# EAGLE board arduino_s3v3_r2 (EAGLE 6.1)
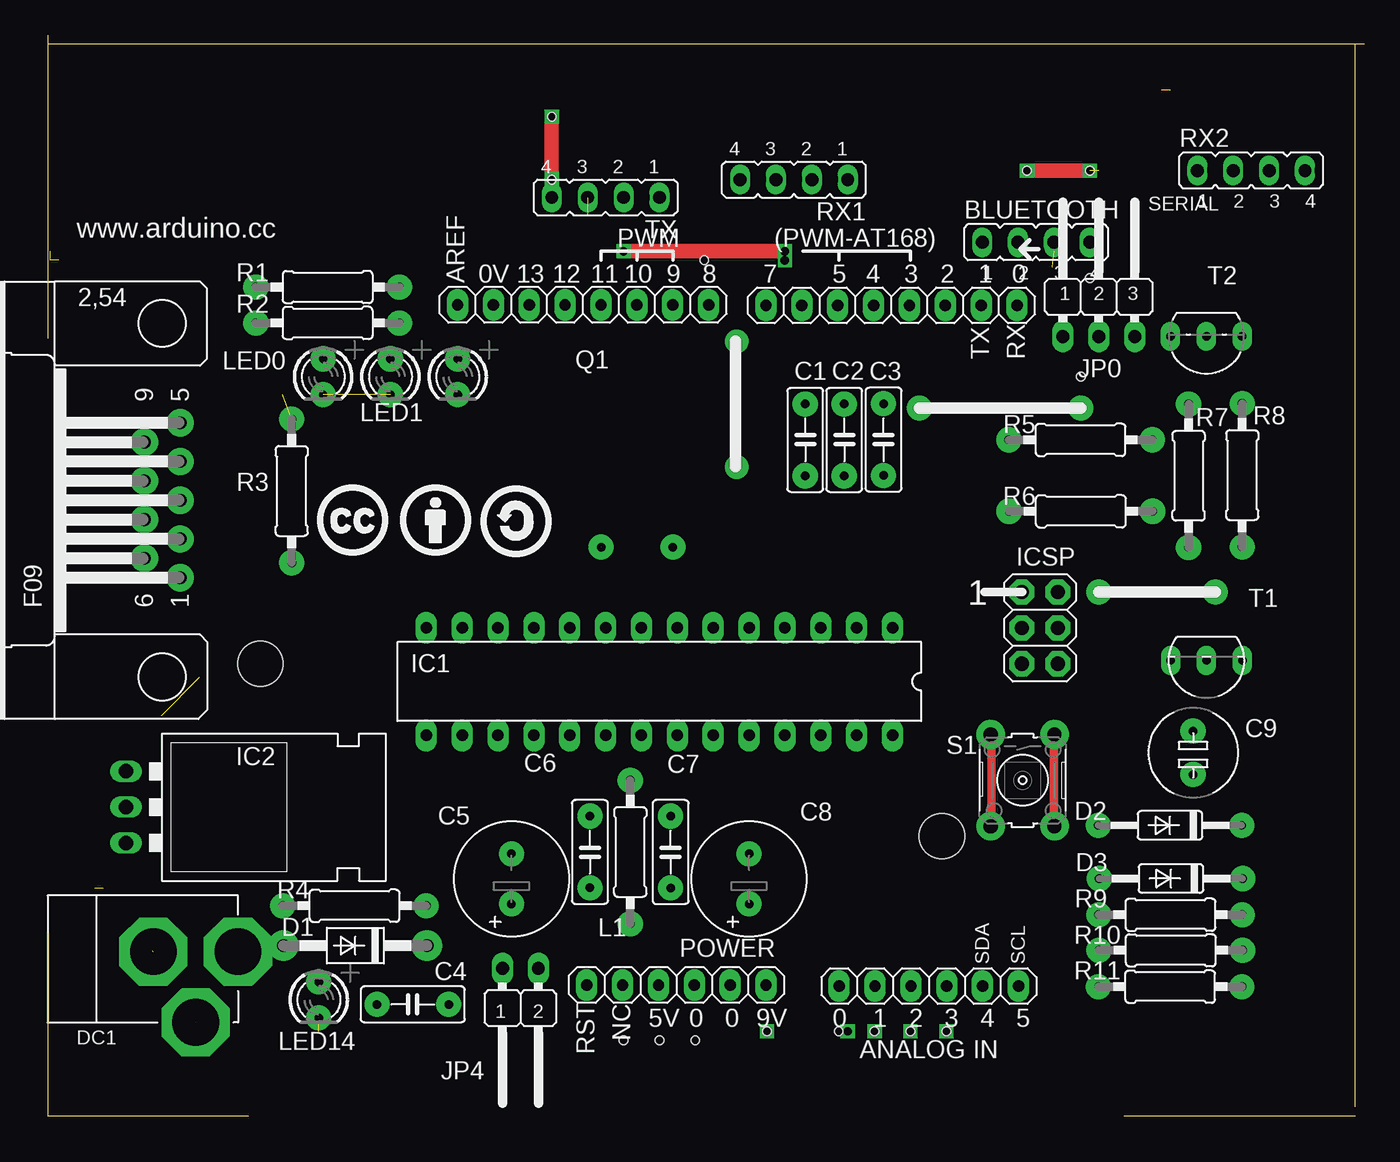
[diagram p0: board, top side]
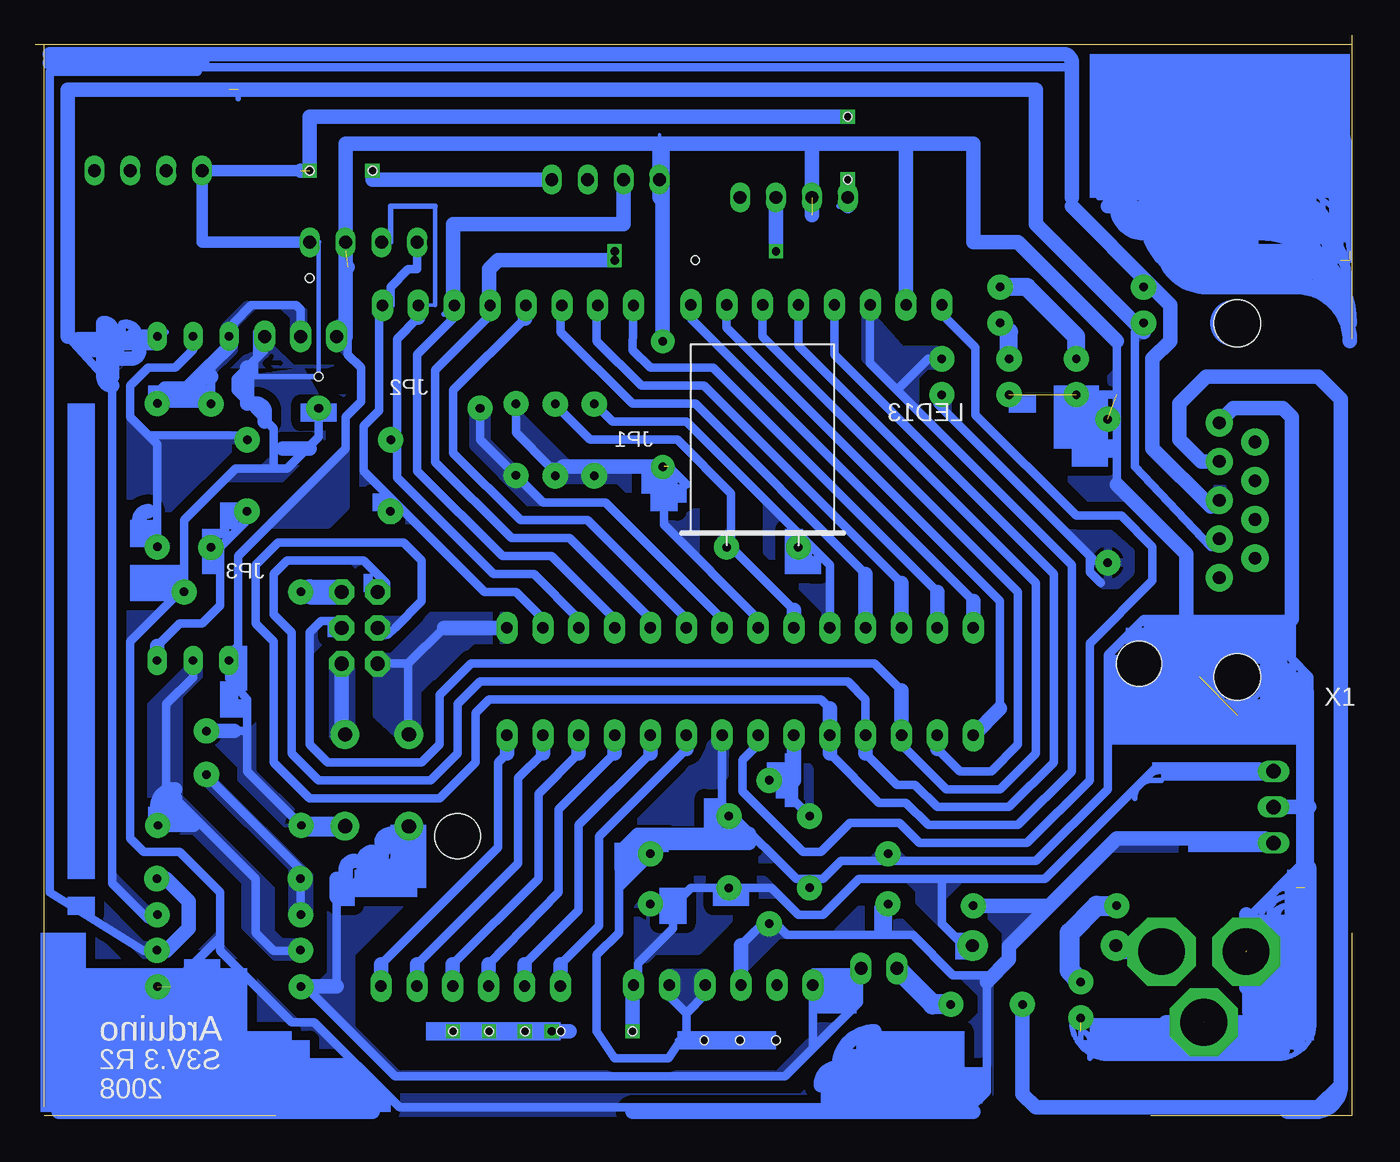
[diagram p1: board, bottom side, seen from below]

Size 93.23 x 76.54 mm. Coordinates in mm from the lower left corner, seen from the top.
Outline: 0.01,76.54 0.01,55.07
Outline: 0.01,12.95 0.01,0 14.23,0
Outline: 76.2,0 92.6,0
Outline: 93.23,75.89 5.48,75.89
Outline: 5.91,75.9 0,75.9
Outline: 92.6,0.64 92.6,14.49
Outline: 92.59,13.54 92.59,75.89
Copper layers (1*16): Top 0.035mm / dielectric 1.5mm / Bottom 0.035mm
Design rules: minimum track width 0.6mm, minimum drill 0.6mm, track to track 0.67mm, track to pad 0.67mm, pad to pad 0.67mm, via to via 0.67mm, smd to smd 0mil, copper to edge 0mil, drill to drill 8mil, minimum pad ring 10mil, minimum via ring 8mil, stop-mask expansion 0mil, vias tented up to drill 0mil, thermal gap 10mil
Net classes: 1 power: width 0.61 mm
Holes 3.2 mm at 63.32,19.81 15.06,32.03
Holes 0.6 mm at 69.35,66.96 73.8,66.96 73.16,52.35 73.8,59.34 35.7,66.32 35.7,70.77 46.49,60.61 56.02,6 58.56,6 61.1,6 63.64,6 50.94,6 40.78,5.36 43.32,5.36 45.86,5.36
bRestrict: 6 lines

## Footprints (pad centres in the part's own frame; a part is rotated, then mirrored left to right if it is on the bottom)
JP4 = drill 0.914 long: 1 -3.81,0; 2 -1.27,0; 3 1.27,0; 4 3.81,0
C050-025X075 = drill 0.6 pad 1.778: 1 -2.54,0; 2 2.54,0
E3,5-8 = drill 0.6 pad 1.778: + -1.778,0; - 1.778,0
E5-6 = drill 0.6 pad 1.778: + -1.54,0; - 1.54,0
DO41-10 = drill 0.9 pad 2.159: A 5.08,0; C -5.08,0
DO35-10 = drill 0.6 pad 1.778: A 5.08,0; C -5.08,0
DC-21MM = drill 3.302 pad 4.826 octagon: 1 -5.08,-3.353; 2 -0.076,-6.35; 3 -0.076,-0.356
DIL28-3 = drill 0.813 pad 1.524 long: 1 -16.51,-3.81; 2 -13.97,-3.81; 3 -11.43,-3.81; 4 -8.89,-3.81; 5 -6.35,-3.81; 6 -3.81,-3.81; 7 -1.27,-3.81; 8 1.27,-3.81; 9 3.81,-3.81; 10 6.35,-3.81; 11 8.89,-3.81; 12 11.43,-3.81; 13 13.97,-3.81; 14 16.51,-3.81; 15 16.51,3.81; 16 13.97,3.81; 17 11.43,3.81; 18 8.89,3.81; 19 6.35,3.81; 20 3.81,3.81; 21 1.27,3.81; 22 -1.27,3.81; 23 -3.81,3.81; 24 -6.35,3.81; 25 -8.89,3.81; 26 -11.43,3.81; 27 -13.97,3.81; 28 -16.51,3.81
78XXL = drill 1.016 long: GND 0,-3.81; IN -2.54,-3.81; OUT 2.54,-3.81
2X03 = drill 1 pad 1.778 octagon: 1 -2.54,-1.27; 2 -2.54,1.27; 3 0,-1.27; 4 0,1.27; 5 2.54,-1.27; 6 2.54,1.27
1X08 = drill 0.8 pad 1.524 long: 1 -8.89,0; 2 -6.35,0; 3 -3.81,0; 4 -1.27,0; 5 1.27,0; 6 3.81,0; 7 6.35,0; 8 8.89,0
1X06 = drill 0.8 pad 1.524 long: 1 -6.35,0; 2 -3.81,0; 3 -1.27,0; 4 1.27,0; 5 3.81,0; 6 6.35,0
JP2W = drill 0.914 pad 1.524 long: 1 -2.54,-1.27; 2 0,-1.27; 3 2.54,-1.27
JP1W = drill 0.914 pad 1.524 long: 1 -1.27,-1.905; 2 1.27,-1.905
0207/10 = drill 0.6 pad 1.778: 1 -5.08,0; 2 5.08,0
LED3MM = drill 0.6 pad 1.778: A -1.27,0; K 1.27,0
Q = drill 0.6 pad 1.778: 1 -2.54,-7.62; 2 2.54,-7.62
B3F-10XX = drill 1 pad 2.032: 1 -3.251,2.261; 2 3.251,2.261; 3 -3.251,-2.261; 4 3.251,-2.261
TO92 = drill 0.6 pad 1.372 long: 1 2.54,0; 2 0,0; 3 -2.54,0
TO92-EBC = drill 0.6 pad 1.372 long: B 0,-1.27; C -2.54,-1.27; E 2.54,-1.27
F09H = drill 0.9 pad 1.93: 1 -5.486,-1.27; 2 -2.743,-1.27; 3 0,-1.27; 4 2.743,-1.27; 5 5.486,-1.27; 6 -4.115,1.27; 7 -1.372,1.27; 8 1.372,1.27; 9 4.115,1.27 | hole 3.302: -12.522,0; 12.522,0

## Placement (x,y rotation side)
BLUETOOTH  BLUETOOTH  [JP4]  69.99,61.88 0 top
C1  22p  [C050-025X075]  56.41,47.88 90 top
C2  22p  [C050-025X075]  53.65,47.88 90 top
C3  100n  [C050-025X075]  59.2,47.9 90 top
C4  100n  [C050-025X075]  25.86,7.9 180 top
C5  100u  [E3,5-8]  32.84,16.79 90 top
C6  100n  [C050-025X075]  38.4,18.7 270 top
C7  100n  [C050-025X075]  44.11,18.69 270 top
C8  100u  [E3,5-8]  49.67,16.79 90 top
C9  10u  [E5-6]  81.11,25.73 270 top
D1  1N4004  [DO41-10]  21.79,12.07 180 top
D2  1N4148  [DO35-10]  79.48,20.58 180 top
D3  1N4148  [DO35-10]  79.54,16.81 180 top
DC1  DC21MMX  [DC-21MM]  7.12,11.71 90 top
IC1  ATMEGA8 (OR 168)  [DIL28-3]  43.32,30.76 180 top
IC2  [78XXL]  9.35,21.87 270 top
ICSP  ICSP  [2X03]  70.25,34.57 270 top
J1  PORT D(D0-D7)  [1X08]  59.75,57.41 180 top
J2  PORT C(A0-A5)  [1X06]  62.4,9.2 0 top
J3  PORT B(D8-D13)  [1X08]  37.91,57.45 180 top
JP0  [JP2W]  74.43,56.48 0 top
JP4  AUTO RESET  [JP1W]  33.48,8.54 180 top
L1  100uH  [0207/10]  41.25,18.7 270 top
LED0  RX  [LED3MM]  19.51,52.35 270 top
LED1  TX  [LED3MM]  24.27,52.35 270 top
LED13  L  [LED3MM]  29.03,52.35 270 top
LED14  POWER LED  [LED3MM]  19.19,8.22 270 top
POWER  [1X06]  44.52,9.28 0 top
Q1  16000  [Q]  41.73,47.91 0 bottom
R1  1K  [0207/10]  19.82,58.7 180 top
R2  1K  [0207/10]  19.82,56.16 180 top
R3  1k  [0207/10]  17.28,44.26 270 top
R4  1k  [0207/10]  21.73,14.89 0 top
R5  10k  [0207/10]  73.14,47.89 0 top
R6  1k  [0207/10]  73.16,42.83 0 top
R7  10k  [0207/10]  80.79,45.34 90 top
R8  10k  [0207/10]  84.59,45.39 270 top
R9  4k7  [0207/10]  79.51,14.25 0 top
R10  10k  [0207/10]  79.53,11.74 0 top
R11  10k  [0207/10]  79.49,9.16 0 top
RX1  [JP4]  52.84,66.32 180 top
RX2  [JP4]  85.23,66.96 0 top
S1  [B3F-10XX]  69.04,23.77 270 top
T1  BC547  [TO92]  82.06,32.26 180 top
T2  BC557  [TO92-EBC]  82.05,53.95 180 top
TX  TX  [JP4]  39.51,65.05 180 top
U$1  [CC]  19.03,39.65 0 top
U$2  [BY]  24.9,39.65 0 top
U$3  [SA]  30.62,39.65 0 top
X1  [F09H]  8.12,43.61 90 top

## Library data of the parts
BLUETOOTH JP0 JP4 RX1 RX2 TX = jumper
C1-C9 L1 R1-R11 = rcl
D1-D3 = diode
DC1 = powersupply
IC1 = atmel
IC2 = v-reg
ICSP J1-J3 POWER = pinhead
LED0 LED1 LED13 LED14 = led
Q1 = special
S1 = switch-omron
T1 T2 = transistor
U$1-U$3 = CC
X1 = con-subd

## Nets
+5V [power]: BLUETOOTH.4 C3.1 C5.+ IC1.7 IC2.OUT ICSP.2 JP0.3 L1.2 POWER.3 R4.2 R11.2 RX1.1 RX2.1 TX.4
AREF: IC1.21 J3.8
GND: BLUETOOTH.3 C1.1 C2.1 C3.2 C5.- C6.2 C7.1 C8.- C9.+ D2.A DC1.1 DC1.3 IC1.8 IC1.22 IC2.GND ICSP.6 J3.7 JP0.1 LED0.K LED1.K LED14.K POWER.4 POWER.5 R3.1 RX1.4 S1.1 S1.2 T1.1 TX.3 X1.5
M8RXD: BLUETOOTH.1 IC1.2 J1.1 R6.1
M8TXD: BLUETOOTH.2 IC1.3 J1.2 R5.1
N$1: IC1.18 ICSP.1 J3.5
N$2: C9.- D3.A R9.1
N$3: LED14.A R4.1
N$4: IC1.17 ICSP.4 J3.4
N$5: IC1.14 J3.1
N$6: C1.2 IC1.9 Q1.1
N$7: C2.2 IC1.10 Q1.2
N$8: D1.A DC1.2
N$10: IC1.4 J1.3 RX1.3
N$11: IC1.5 J1.4 TX.2
N$12: IC1.6 J1.5
N$13: IC1.11 J1.6
N$14: IC1.12 J1.7
N$15: IC1.13 J1.8
N$16: IC1.23 J2.1
N$17: IC1.24 J2.2
N$18: IC1.25 J2.3
N$19: IC1.26 J2.4
N$20: IC1.27 J2.5
N$21: IC1.28 J2.6
N$22: IC1.15 J3.2
N$23: IC1.16 J3.3
N$25: D3.C R1.2 R10.2 X1.3
N$26: R6.2 R7.1 T1.3
N$27: R5.2 R8.2 T2.B
N$31: LED13.K R3.2
N$32: LED1.A R2.1
N$33: LED0.A R1.1
N$34: C4.1 JP4.2
N$38: C4.2 X1.4
N$39: R2.2 R9.2 T2.C X1.2
N$42 [power]: C6.1 IC1.20 L1.1
N$65: D2.C R10.1 T1.2
RESET: IC1.1 ICSP.5 JP4.1 POWER.1 R11.1 S1.3 S1.4
SCK: IC1.19 ICSP.3 J3.6 LED13.A
SERIAL_VCC: JP0.2 R7.2 R8.1 T2.E
VIN [power]: C7.2 C8.+ D1.C IC2.IN POWER.6

## Tracks (layer width: path | path; a pad name or v marks a point on that pad's centre or on a via)
+5V  (via drill 0.6 pad 1.78, 0.61 pad 1.78)  (2 unrouted)
  Top 0.6: v73.16,50.13 v61.73,50.13 | v82.69,37.11 v74.43,37.11
  Top 1.016: TX.4 35.7,70.77 | 69.35,66.96 73.8,66.96
  Bottom 0.254: RX2.1 81.42,66.32
  Bottom 0.305: 73.16,61.88 73.16,52.35
  Bottom 0.406: BLUETOOTH.4 73.16,61.88 | 73.16,52.35 77.61,52.35 77.61,55.53 | 81.42,66.32 81.42,67.59
  Bottom 0.6: 80.15,12.66 80.15,15.84 83,18.7 85.55,18.7 86.5,19.65 86.5,33.62 83,37.11 v82.69,37.11 82.69,42.19 79.04,45.84 76.34,45.84 | v74.43,37.11 73.8,37.11 v74.43,37.11 | 41.25,14.09 43.25,12.1 | IC2.OUT 6.17,19.65 | 80.15,12.66 83.64,9.17 | C3.1 57.29,43.46 52.84,43.46 44.59,35.21 | C3.1 61.73,47.91 v61.73,50.13 | 80.15,12.66 80.15,11.71 75.07,6.63 73.48,6.63 67.45,0.6 26.97,0.6 25.85,1.71 25.85,9.49 25.85,9.97 28.24,9.97 31.09,12.82 | JP0.3 76.97,54.26 78.24,52.99 79.04,52.19 79.04,51.4 76.34,48.7 76.34,45.84 | v73.16,50.13 73.16,48.07 75.38,45.84 76.34,45.84 | R4.2 | 31.09,12.82 | C3.1 59.19,45.53 C3.1 | 41.25,14.09 | 31.09,12.82 32.84,12.82 | 32.84,12.82 39.98,12.82 41.25,14.09 | C5.+ 32.84,12.82
  Bottom 0.813: BLUETOOTH.4 81.42,61.88 81.42,66.32 | 74.43,66.96 RX2.1
  Bottom 1.016: 43.25,12.1 POWER.3 | 21.41,14.89 16.65,19.65 6.17,19.65 | 21.41,14.89 24.27,12.03 24.27,11.08 25.85,9.49 | 83,9.17 83.64,9.17 86.18,9.17 | 21.41,14.89 R4.2 | 44.59,35.21 IC1.7 | 78.24,52.99 78.24,50.45 | RX1.1 69.35,66.32 69.35,66.96 | 74.43,66.96 73.8,66.96 73.8,70.77 35.7,70.77
  Bottom 1.778: 73.8,37.11 ICSP.2
  pour Bottom: 25.38,1.55 25.38,9.97 27.13,9.97 27.92,9.97 26.49,8.54 26.49,7.27 27.6,6.16 34.43,6.16 39.03,1.55 68.4,1.55 73.48,6.63 74.43,6.63 80.15,12.35 80.15,13.3 83.64,9.81 84.59,9.81 85.23,9.17 89.99,13.94 89.99,-0.04 26.97,-0.04
  pour Bottom (no thermals): 7.12,18.7 17.6,18.7 16.65,19.65 7.12,19.65
  pour Bottom: 73.16,51.08 71.26,51.08 72.69,49.65 72.69,47.91 75.7,44.89 79.99,44.89 78.88,46 77.29,46 76.18,47.11 76.18,48.54 78.72,51.08 78.72,51.08 79.04,51.4 79.04,52.35 74.27,52.99
  pour Bottom: 86.5,33.62 86.5,37.75 85.86,38.38 83.64,38.38 82.69,39.34 82.69,37.43
  pour Bottom (no thermals): 72.05,53.15 74.91,53.15 76.34,54.58 76.81,54.58 80.31,52.99 72.53,52.99
  pour Bottom (no thermals): 59.19,45.37 57.29,43.46 58.24,43.46 62.21,47.43 62.21,50.13 61.26,50.13 61.26,47.75 59.19,45.69
  pour Bottom: 31.09,12.82 33.32,15.05 34.35,15.05 36.57,12.82
  pour Bottom (no thermals): 39.98,12.82 40.62,12.82 43.24,10.2 43.24,12.11 41.25,14.09
  pour Bottom: 24.27,12.03 24.27,13.14 26.01,14.89 21.41,14.89
AREF
  Bottom 0.6: 42.05,26.64 42.05,26.32 43.16,25.21 43.16,22.98 41.25,21.08 38.87,18.7 37.6,18.7 35.54,20.76 32.05,20.76 30.62,19.33 23,19.33 18.55,23.78 18.55,33.46 14.11,37.91 14.11,40.29 16.33,42.51 19.5,42.51 26.65,49.65 26.65,54.42 28.71,56.48 28.71,57.43 J3.8
  Bottom 1.016: 42.05,26.64 IC1.21
GND  (via drill 0.6 pad 1.68, 1 pad 2.03)  (11 unrouted)
  Top 0.6: 48.72,54.85 48.72,45.96 v48.79,45.96 | 48.72,54.85 48.72,54.89 | v48.79,54.85 48.72,54.85 | 71.26,20.6 S1.2 | 71.26,20.6 71.26,26.95 S1.1 | S1.2 71.26,20.6
  Bottom 0.406: 3.31,18.06 arc90 2.68,17.43 | 2.68,17.43 2.68,6.63 arc90 5.22,4.09 | 5.22,4.09 17.28,4.09 arc90 19.82,6.63 19.82,7.27 | 3.31,16.16 3.31,6 | 2.68,17.43 arc-90 3.95,16.16 3.95,5.36 | 4.58,4.73 arc90 5.22,4.09 | 19.19,6 arc90 18.55,5.36 18.55,4.73 | 18.55,4.73 18.55,4.09 | 18.55,4.73 arc90 17.92,5.36 16.65,5.36
  Bottom 0.6: D2.A 74.41,20.52 | 74.39,20.56 D2.A | 74.43,20.6 78.24,24.41 78.24,27.27 | 79.51,32.67 78.88,33.3 78.88,39.65 71.26,47.27 71.26,49.5 70.15,50.61 70.15,52.99 71.1,53.94 71.1,55.21 71.26,55.21 JP0.1 | 79.51,32.67 79.51,31 78.24,29.49 78.24,27.27 | 42.05,35.21 48.72,41.87 48.72,46 48.75,46 v48.79,45.96 | 16.65,44.73 16.65,51.08 | 16.65,51.08 16.65,54.89 | 31.57,57.12 J3.7 | 8.07,35.21 4.26,35.21 4.26,32.35 2.99,31.08 | 8.07,35.21 11.73,35.21 12.84,35.21 | 2.99,31.08 2.99,21.87 2.99,18.38 3.31,18.06 7.44,13.94 7.47,13.62 | 78.24,27.27 79.16,27.27 | 13.16,6.64 10.5,6.64 | 13.16,6.64 13.47,6.63 19.19,6.64 LED14.K | 44.11,20.13 50.62,20.13 51.89,18.86 51.89,16.16 | 51.89,16.16 51.89,12.98 53.48,11.4 53.48,6 52.21,4.09 48.4,4.09 47.13,6 47.13,7.27 | 10.3,6.63 13.16,6.64 | 7.44,6.63 7.44,11.71 7.47,13.62 | 7.47,13.62 7.48,14.29 | 74.43,20.6 74.43,20.58 D2.A | 74.39,20.56 74.43,20.6 | 74.39,20.56 74.35,20.52 | 71.3,26.95 71.26,26.95 71.52,27.22 | 47.13,7.27 48.4,8.54 48.4,9.17 48.33,9.17 POWER.5 | POWER.4 45.79,8.61 47.13,7.27 | 16.65,51.08 LED0.K | 47.13,44.73 48.4,46 | T1.1 79.53,32.67 79.51,32.67 | 12.84,35.21 14.74,35.21 17.28,32.67 17.28,23.14 22.36,18.06 32.84,18.06 | 12.84,35.21 12.84,31.08 10.77,31.08 | 2.99,31.08 5.38,31.08 | 8.07,35.21 8.07,33.78 | 8.07,26.64 8.07,28.38 | 32.84,18.06 36.17,18.06 37.44,16.79 38.4,16.79 C6.2 38.4,16.79 39.34,16.79 43.95,21.4 | C5.- 32.84,18.06 | 55.86,46 56.81,46 59.19,48.39 59.19,50.13 59.19,50.28 C3.2 | 43.95,21.4 44.43,21.87 44.46,21.87 44.11,20.6 44.11,20.13 | C7.1 44.11,20.92 44.11,20.13 | C8.- 49.67,18.38 51.89,16.16 | 43.95,21.4 | IC1.22 44.59,22.03 43.95,21.4
  Bottom 0.6: 53.64,46 53.64,45.84 53.65,45.83 C2.1 | BLUETOOTH.3 71.13,61.88
  Bottom 1.016: 48.79,68.86 v48.79,54.85 | X1.5 9.39,49.13 8.39,50.13 4.9,50.13 4.26,49.49 4.26,35.21 | 11.73,35.21 11.73,39.81 16.65,44.73 | 16.65,54.89 23.63,61.88 26.81,61.88 26.81,68.86 31.57,68.86 | 31.57,68.86 31.57,57.12 | 31.57,68.86 38.24,68.86 | 38.24,68.86 48.79,68.86 | 79.16,27.27 C9.+ | 2.99,21.87 IC2.GND | 7.48,14.29 7.48,9.11 | S1.1 71.3,26.95 | 71.52,27.22 ICSP.6 | 4.9,11.71 7.44,11.71 9.35,11.71 | 7.44,6.63 10.3,6.63 | 10.3,6.63 13.16,6.63 | 10.3,6.63 10.3,4.41 | 49.03,68.86 71.26,68.86 BLUETOOTH.3 71.26,61.24 71.26,56.16 | 56.49,45.37 55.87,45.99 | 55.87,45.99 55.86,46 | 48.72,46 53.64,46 55.87,45.99 | 42.05,35.21 IC1.8 | 38.24,68.86 38.24,63.78 | 48.79,68.86 49.03,68.86 | 49.03,68.86 RX1.4 49.03,65.05 | 71.1,60.13 71.26,60.13 71.26,55.21
  Bottom 1.422: 74.35,20.52 S1.2
  other vias: 71.3,20.52
  pour Bottom: 46.49,44.1 46.49,39.65 52.84,46 48.4,46
  pour Bottom (no thermals): 45.7,10.12 48.4,10.12 48.4,8.86 47.13,7.58 45.7,9.01
  pour Bottom (no thermals): 4.58,22.51 2.68,24.41 2.68,19.33 4.58,21.24
  pour Bottom (no thermals): 70.62,31.71 70.62,26.79 70.78,26.64 72.21,26.64 72.37,26.79 72.37,31.71
  pour Bottom: 24.27,51.08 24.27,49.49 18.55,43.78 15.7,43.78 16.65,44.73 16.65,52.67 18.24,51.08
  pour Bottom: 74.43,21.24 77.61,24.41 77.61,32.98 78.88,34.25 78.88,32.03 80.78,30.13 80.78,26.64 78.88,24.73 78.88,23.78 75.39,20.29 74.43,20.29
  pour Bottom: 71.26,47.27 71.26,43.14 72.53,41.88 76.66,41.88
  pour Bottom (no thermals): 72.21,56 71.26,56.96 71.26,53.78 72.21,54.73
  pour Bottom (no thermals): 59.19,49.81 55.54,46.16 52.84,46.16 51.73,45.05 55.86,45.05 59.19,48.38
  pour Bottom: 51.89,19.33 46.97,24.25 44.59,24.25 44.59,22.03 40.78,18.22 49.83,18.22 51.89,16.16
  pour Bottom (no thermals): 46.97,24.25 44.59,26.79 44.59,24.25
  pour Bottom (no thermals): 32.84,19.17 31.73,18.06 33.95,18.06
M8RXD
  Bottom 0.6: 57.29,35.21 59.19,37.11 61.41,37.11 67.76,43.46 | 67.76,43.46 R6.1 | 67.76,43.46 69.99,45.69 69.99,48.86 68.88,49.97 68.88,56.96 | 68.64,57.36 J1.1 68.08,57.43 68.08,58.7 66.81,59.97 66.18,59.97 BLUETOOTH.1
  Bottom 1.016: IC1.2 57.29,35.21 | 68.88,56.96 68.64,57.36
  pour Bottom: 69.99,45.69 69.99,43.15 69.04,42.19 66.5,42.19
M8TXD
  Bottom 0.254: J1.2 64.91,57.41
  Bottom 0.305: 64.91,57.41 64.91,64.42
  Bottom 0.406: BLUETOOTH.2 68.08,61.88 68.08,64.42 64.91,64.42
  Bottom 0.6: 54.75,35.21 57.92,38.38 60.78,38.38 67.29,44.89 67.61,45.21 67.61,47.91 | 66.1,56.55 66.18,56.48 67.61,55.03 67.61,47.91 | R5.1 68.04,47.91 67.61,47.91
  Bottom 1.016: IC1.3 54.75,35.21 | 66.1,56.55 J1.2
N$1
  Bottom 0.6: ICSP.1 68.4,37.11 68.4,37.75 69.99,39.34 75.39,39.34 76.34,38.38 76.34,35.52 75.07,34.25 75.07,25.68 73.16,23.78 65.23,23.78 63.32,25.68 63.32,29.18 61.73,30.76 35.7,30.76 34.43,29.49 IC1.18 | J3.5 36.64,53.93 21.09,38.38 21.09,25.05 24.27,21.87 29.35,21.87 30.93,23.46 32.21,23.46 34.43,25.68
  Bottom 1.016: 34.43,25.68 IC1.18
  pour Bottom (no thermals): 68.4,37.43 68.4,37.75 69.99,39.34 71.1,39.34 69.83,38.06 69.83,37.43
N$2
  Bottom 0.6: C9.- 80.79,23.79 74.43,17.43 74.43,16.81 | R9.1 | R9.1 74.45,14.26 | 74.43,16.81 D3.A | R9.1 74.43,16.81
  pour Bottom (no thermals): 75.23,14.41 75.23,17.43 81.26,23.46 80.31,24.41 80.31,23.78 73.64,17.11 73.64,14.41
N$3
  Bottom 0.6: R4.1 | LED14.A 19.19,9.81 19.35,9.65
  Bottom 1.422: R4.1 18.08,14.89 19.98,12.98 19.98,10.28 19.35,9.65 LED14.A
N$4
  Bottom 0.6: 31.89,30.13 33.79,32.03 62.37,32.03 64.59,29.81 64.59,26.32 65.86,25.05 72.53,25.05 73.8,26.32 73.8,34.25 73,35.05 71.58,35.05 ICSP.4 | J3.4 39.18,54.57 22.36,37.75 22.36,25.68 24.9,23.14 28.71,23.14 31.89,26.32 | IC1.17
  Bottom 1.016: IC1.17 31.89,30.13 | 31.89,26.32 IC1.17
  pour Bottom (no thermals): 71.89,33.78 72.53,33.78 73.64,32.67 73.64,34.25 73,34.89 72.37,34.89 71.89,35.37
N$5
  Bottom 0.6: IC1.14 | 26.81,36.48 46.81,56.48 46.81,57.12 J3.1
  Bottom 1.016: IC1.14 26.81,36.48
N$6
  Bottom 0.6: 39.51,35.84 43.95,40.29 | 43.95,40.29 Q1.1 | 43.95,40.29 43.95,44.1 47.76,47.91 53.95,47.91 56.49,50.45 C1.2
  Bottom 1.016: IC1.9 39.51,35.84
  pour Bottom (no thermals): 44.27,39.65 43,39.65 43.95,40.6 43.95,41.88 44.91,40.92 44.91,40.29
N$7  (1 unrouted)
  Bottom 0.6: 38.87,40.92 47.13,49.18 52.37,49.18 53.64,50.45 53.65,50.45 C2.2 | IC1.10 36.97,39.02 38.87,40.92 | 38.87,40.92 Q1.2
  pour Bottom: 36.97,37.11 38.56,37.11 41.41,39.97 41.41,43.46 36.97,39.02
  pour Bottom (no thermals): 38.56,37.11 37.29,35.84 37.29,35.05 36.97,35.05 36.97,37.11
N$8
  Bottom 0.6: 16.65,12.03 16.65,12.07
  Bottom 1.016: 16.65,12.07 D1.A | DC1.2 16.25,11.64 16.65,12.03
N$9
  Bottom 0.406: 3.95,16.79 arc-90 4.58,16.16 | 4.58,16.16 4.58,15.52 | 4.58,15.52 4.58,14.89 | 4.58,14.89 4.58,6 | 4.58,15.52 arc-90 6.49,13.62 6.49,12.98 | 4.58,16.16 arc-90 5.85,14.89 5.85,14.25 | 4.58,15.52 arc-90 5.85,14.25 | 5.85,14.25 5.85,13.62 | 4.58,14.89 arc-90 5.85,13.62 | 4.58,14.89 arc-90 5.85,13.62 | 5.85,13.62 5.85,12.98 | 4.58,14.89 arc-90 5.22,14.25 5.22,12.98
N$10
  Bottom 0.6: 52.21,35.21 56.65,39.65 60.15,39.65 66.18,45.68 66.18,53.94 63.64,56.48 63.64,57.43 J1.3
  Bottom 1.016: IC1.4 52.21,35.21 | RX1.3 51.57,63.15 55.38,63.15 63.64,63.15 63.64,57.43
N$11  (via drill 0.6)
  Top 1.016: v40.78,61.24 v52.21,61.24
  Bottom 0.6: 49.67,35.21 55.38,40.92 59.51,40.92 64.91,46.32 64.91,52.83 61.1,56.64 61.1,57.43 | 61.1,57.43 61.1,58.07 | 61.1,57.43 J1.4
  Bottom 1.016: IC1.5 49.67,35.21 | 61.1,58.07 61.1,59.97 60.46,60.61 v52.21,60.61 v52.21,61.24 | TX.2 v40.78,61.24
N$12
  Bottom 0.6: 47.13,35.21 54.11,42.19 58.87,42.19 63.64,46.95 63.64,51.4 58.56,56.48 | 58.56,57.43 J1.5
  Bottom 1.016: IC1.6 47.13,35.21 | 58.56,56.48 58.56,57.43
N$13
  Bottom 0.6: 34.43,38.38 46.49,50.45 50.94,50.45 56.02,55.53 56.02,57.41 | 56.02,57.41 56.02,57.43 | 56.02,57.41 J1.6
  Bottom 1.016: IC1.11 34.43,38.38
N$14
  Bottom 0.6: 31.89,37.75 45.86,51.72 50.3,51.72 53.48,54.89 53.48,57.41 | 53.48,57.41 53.48,57.43 | 53.48,57.41 J1.7
  Bottom 1.016: IC1.12 31.89,37.75
N$15
  Bottom 0.6: 29.35,37.11 45.22,52.99 49.67,52.99 50.94,54.26 J1.8
  Bottom 1.016: IC1.13 29.35,37.11
N$16
  Bottom 0.6: 47.13,26 53.32,19.81 53.32,13.46 56.05,10.73
  Bottom 1.016: 47.13,26 IC1.23 | 56.05,10.73 J2.1
N$17
  Bottom 0.6: 49.67,25.68 54.75,20.6 54.75,14.57 58.59,10.73
  Bottom 1.016: 49.67,25.68 IC1.24 | J2.2 58.59,10.73
N$18
  Bottom 0.6: 52.21,25.68 56.18,21.71 56.18,15.84 61.13,10.73
  Bottom 1.016: 52.21,25.68 IC1.25 | J2.3 61.13,10.73
N$19
  Bottom 0.6: 54.75,25.68 57.61,22.82 57.61,16.79 63.67,10.73
  Bottom 1.016: 54.75,25.68 IC1.26 | J2.4 63.67,10.73
N$20
  Bottom 0.6: 57.29,25.68 59.03,23.94 59.03,17.9 66.21,10.73
  Bottom 1.016: 57.29,25.68 IC1.27 | J2.5 66.21,10.73
N$21
  Bottom 0.6: 59.83,25.68 60.46,25.05 60.46,19.02 68.75,10.73
  Bottom 1.016: 59.83,25.68 IC1.28 | 68.75,10.73 J2.6
N$22
  Bottom 0.6: IC1.15 | 24.9,28.86 24.9,36.48 44.27,55.84 44.27,57.12 J3.2
  Bottom 1.016: 24.9,28.86 IC1.15
N$23
  Bottom 0.6: 29.35,26 27.76,24.41 25.54,24.41 23.63,26.32 23.63,37.11 41.73,55.21 41.73,57.12 | 41.73,57.12 41.73,57.43 | 41.73,57.12 J3.3
  Bottom 1.016: 29.35,26 IC1.16
N$24
  Bottom 0.406: 3.31,17.43 arc-90 3.95,16.79 3.95,4.73
N$25
  Bottom 0.6: 83.93,11.74 R10.2 83.96,11.71 | D3.C 84.59,16.79 83.96,16.79 | 84.59,11.71 85.55,11.71 92.21,15.84 92.21,73.94 81.73,73.94 81.73,74.26 19.82,74.26 19.82,65.05 19.82,64.42 | X1.3 9.35,43.3 9.35,43.15 9.98,43.15 | 14.11,58.7 R1.2
  Bottom 1.016: 83.93,11.74 82.37,13.3 82.37,15.2 83.96,16.79 | 9.98,43.15 14.11,47.27 14.11,53.62 12.84,54.89 12.84,57.43 14.11,58.7 19.82,64.42 | 84.59,11.71 83.96,11.71 | 19.82,65.05 19.82,74.58 arc-90 20.46,75.21 92.21,75.21
  pour Bottom (no thermals): 84.91,12.35 85.55,12.35 88.88,15.68 89.99,15.52 85.55,11.08 84.91,11.08
  pour Bottom (no thermals): 9.35,44.41 9.35,43.15 9.98,43.15
N$26
  Bottom 0.6: 84.6,32.66 T1.3 | 84.59,33.3 83,34.89 81.42,34.89 80.15,36.16 80.15,40.29 | 80.15,40.29 78.24,42.19 R6.2 | R7.1 80.77,40.29 80.15,40.29
  Bottom 1.016: 84.59,33.3 84.6,32.66
  pour Bottom: 78.24,42.19 78.24,43.46 79.83,43.46 81.42,41.88 81.42,38.7 80.15,37.43 80.15,40.29
N$27
  Bottom 0.6: R5.2 78.58,48.2 85.23,48.23 | R8.2 84.59,40.29 R8.2 | 85.23,48.23 84.59,47.59 R8.2 | 85.23,48.23 86.5,49.49 86.5,51.72 85.23,52.99 83.32,52.99 82.05,54.26 T2.B
  pour Bottom: 78.24,48.23 78.24,47.59 79.2,47.59 83.96,42.83 83.96,40.6 84.59,39.97 85.55,39.97 86.5,40.92 86.5,49.49 85.23,48.23
N$28
  Bottom 0.406: 19.19,6.63 19.19,5.36
N$29
  Bottom 0.254: 49.03,69.5 49.03,63.15
N$30  (via drill 0.6)
  Bottom 0.813: v35.7,70.77 73.8,70.77 v73.8,66.96
N$31
  Bottom 0.6: 18.24,39.34 29.35,50.45 29.35,51.08 LED13.K | R3.2 | R3.2 | R3.2 17.28,39.34 18.24,39.34 | 17.76,37.75 18.55,38.54 18.55,39.49 18.39,39.34 18.24,39.34
  pour Bottom (no thermals): 28.4,51.08 28.4,49.49 29.35,50.45 29.35,51.08
  pour Bottom: 15.7,38.54 15.7,39.97 17.12,41.24 20.14,41.24 18.55,39.65 18.55,38.54 17.6,37.59 16.65,37.59
N$32
  Bottom 1.27: LED1.A 24.27,55.53 R2.1
N$33
  Bottom 1.27: LED0.A 19.5,55.21 23,58.7 R1.1
N$34
  Bottom 1.422: C4.1 29.67,7.9 JP4.2
N$35  (via drill 0.6)
  other vias: 69.35,66.96
N$36
  Bottom 0.254: 63,66.32 56.65,66.32
N$37
  Bottom 0.254: 51.57,66.32 51.57,66.96
  Bottom 0.406: 63.64,56.8 64.27,56.8
  Bottom 1.016: 63.64,56.8 63.64,63.15 51.57,63.15 51.57,66.32
N$38
  Bottom 0.6: C4.2
  Bottom 1.016: 0.77,2.19 2.36,0.6 22.36,0.6 23.32,1.55 C4.2 | 0.77,2.19 0.77,50.77 2.36,52.35 10.3,52.35 12.2,50.45 12.2,47.91 10.65,46.36 X1.4 | 0.77,2.19 arc90 2.68,0.28 4.58,0.28
N$39  (1 unrouted)
  Bottom 0.406: 85.86,55.53 arc-53 87.77,53.62 arc-37 87.77,51.72 | 78.24,72.67 78.88,72.67 78.88,72.04
  Bottom 0.6: 84.59,13.94 85.23,13.94 87.77,16.46 87.77,51.72 90.94,55.21 87.76,55.22 T2.C | 84.59,13.94 84.61,14.26 | 15.38,55.53 14.74,55.53 | 15.38,55.53 15.38,46 9.98,40.29 9.35,40.29 9.35,40.55 X1.2 | 15.38,55.53 R2.2 | R9.2 85.23,14.25 84.59,13.94
  Bottom 1.016: 14.74,55.53 22.36,63.15 22.36,72.67 78.24,72.67 85.23,72.67 | 79.51,72.67 90.94,72.67 90.94,55.21 | 87.77,51.72 arc90 88.4,52.35 88.4,53.62 | 88.4,53.62 88.4,56.16 arc90 87.77,55.53 87.77,53.62 | 87.77,53.62 87.77,52.35 | 88.4,53.62 arc-90 89.04,54.26 90.31,54.89 | 85.86,54.26 arc90 86.5,53.62 87.77,53.62
  pour Bottom (no thermals): 14.58,56.96 15.54,55.53 15.54,54.42 14.58,55.37
  pour Bottom (isolate 0.254, no thermals): 84.91,14.57 87.77,17.43 87.77,16.48 85.55,14.25 84.91,14.25
  pour Bottom (isolate 0.025): 83.96,55.21 87.77,56.16 87.77,52.35 84.91,55.21
N$41  (via drill 0.6)
  Bottom 0.406: 35.7,64.42 36.33,64.42
  Bottom 1.016: v35.7,66.32 35.7,64.42
N$42
  Bottom 0.6: 39.51,23.78 39.51,22.35 C6.1 | 39.51,23.78 | 39.51,23.78 L1.1
  Bottom 1.016: 39.51,23.78 IC1.20
  pour Bottom: 38.4,21.24 38.4,24.57 39.51,25.68 39.51,26.32 41.41,24.41 41.41,24.25
N$43  (via drill 0.6)
  Bottom 1.016: 50.94,9.81 v50.94,6
N$44  (via drill 0.6)
  Bottom 0.406: 56.02,6 v56.65,6 57.29,6 v58.56,6 v61.1,6 v63.64,6 64.91,6
  Bottom 1.016: 57.29,6 55.38,6
N$45
  Bottom 0.406: 40.78,5.36 47.76,5.36
N$47
  Bottom 0.406: 13.47,24.41 arc-90 15.38,22.51 arc90 14.11,23.78 13.47,23.78
N$49
  Bottom 1.016: 68.08,19.97 arc-90 68.72,19.33
N$50
  Bottom 1.016: 69.35,18.7 arc-90 69.99,18.06 69.99,17.43
N$51
  Bottom 0.406: 87.13,56.16 arc90 87.77,54.26 | 87.77,54.26 87.77,53.62 | 87.77,54.26 86.5,55.53 | 87.13,56.16 arc90 85.86,55.53 | 85.86,55.53 87.13,56.16 | 87.13,56.16 87.77,53.62 | 83.96,55.53 85.86,55.53 | 85.86,55.53 87.77,53.62 | 87.77,54.26 87.77,55.53
N$52
  Bottom 1.016: 70.62,18.06 arc-90 71.26,17.43 71.26,16.16
N$53
  Bottom 1.016: 71.89,16.79 71.89,15.52
N$54
  Bottom 1.016: 67.45,18.7 arc90 68.72,17.43 69.35,17.43
N$55
  Bottom 1.016: 68.08,19.33 arc-90 68.72,18.7 68.72,16.16
N$56  (2 unrouted)
  Bottom 0.406: 10.93,69.5 9.03,69.5 arc90 0.14,60.61 0.14,68.23 arc-90 4.58,72.67 | 0.14,58.7 arc-90 7.12,65.69 | 7.12,65.69 10.93,65.69 | 0.14,61.24 arc-90 4.58,65.69 7.12,65.69 | 5.85,68.86 arc90 1.41,64.42 | 1.41,64.42 1.41,62.51 | 2.68,63.78 2.68,65.05 arc-90 4.58,66.96 arc90 2.04,64.42 2.04,62.51 arc-90 3.95,64.42 5.85,64.42 | 0.14,57.43 arc-90 7.76,65.05 | 7.76,65.05 16.65,65.05 17.92,65.05 | 5.22,65.05 arc90 0.77,60.61 0.77,61.88 | 5.22,65.05 7.76,65.05 | 3.31,70.13 arc90 0.77,67.59 0.77,61.88 | 1.41,62.51 arc-90 3.95,65.05 | 1.41,62.51 arc-90 3.95,65.05 | 3.95,65.05 5.22,65.05 | 0.77,61.88 arc90 1.41,62.51 | 1.41,64.42 1.41,67.59
  Bottom 0.6: 4.66,62.24 4.58,62.51 4.62,62.36 | 15.38,63.78 15.29,63.95 | 14.45,62.61 14.74,62.51 14.65,62.74 | 14.11,63.15 14.57,63.03 | 10.93,59.34 11.03,59.07 | 1.63,60.25 2.04,59.97 2.15,59.86 | 12.2,61.24 12.34,61.18 | 1.41,60.61 1.72,60.39
  Bottom 1.016: 13.47,62.51 arc22 14.65,62.74 arc68 16.65,65.69 17.28,69.5 | 1.41,60.61 arc-90 4.58,63.78 13.47,63.78 | 0.77,57.43 arc-34 1.63,60.25 arc-2 1.72,60.39 arc-40 4.62,62.36 arc-14 5.85,62.51 7.12,62.51 | 12.2,61.24 4.58,61.24 arc90 2.04,58.7 arc-90 3.31,59.97 | 1.41,61.24 arc-90 3.31,63.15 14.11,63.15 | 2.04,62.51 arc-90 3.95,64.42 14.74,64.42 arc-14 14.57,63.03 arc-4 14.45,62.61 arc-51 11.03,59.07 arc-21 9.03,58.7 2.68,58.7 | 0.14,56.16 arc-73 4.66,62.24 arc-17 6.49,62.51 12.84,62.51 | 1.41,58.07 arc-45 2.15,59.86 arc-45 3.95,60.61 10.93,60.61 arc90 11.57,59.97 12.2,59.97 | 2.04,59.34 arc-90 2.68,59.97 3.31,59.97 | 3.31,59.97 10.93,59.97 | 0.14,54.89 arc-90 3.95,58.7 10.3,58.7 arc37 12.2,59.34 | 12.2,59.34 arc16 12.84,59.97 | 12.84,59.97 arc37 13.47,61.88 | 13.47,61.88 arc-90 16.01,64.42 16.65,64.42 | 16.65,64.42 17.28,64.42 | 17.28,64.42 16.65,65.05 | 3.31,59.34 10.93,59.34 | 2.68,61.88 arc-90 3.31,62.51 4.58,62.51 5.22,62.51 | 7.12,61.88 13.47,61.88 | 13.47,61.88 arc63 12.34,61.18 arc27 12.2,60.61 12.2,59.97 | 12.2,59.97 12.2,59.34 | 11.57,60.61 arc90 12.2,59.97 | 12.2,59.97 12.84,59.97 | 17.28,64.42 arc27 15.29,63.95 arc63 12.84,59.97 | 14.74,62.51 arc90 16.65,64.42 | 15.38,63.78 15.38,63.15
N$57
  Bottom 1.016: 42.68,19.33 49.03,19.33
N$58
  Bottom 1.016: 42.68,19.97 43.32,19.97
N$59
  Bottom 1.016: 77.61,50.45 arc90 76.97,49.81 76.97,49.18
N$60
  Bottom 1.016: 73.8,47.27 75.7,47.27
N$61
  Bottom 1.016: 85.23,42.83 arc-90 85.86,42.19
N$62
  Bottom 1.016: 33.79,6 arc-90 36.33,3.46 | 36.33,3.46 36.33,2.19 | 36.33,3.46 arc-90 37.6,2.19
N$63
  Bottom 1.016: 70.62,2.82 arc90 69.99,2.19 69.99,1.55
N$64
  Bottom 1.016: 68.72,1.55 arc90 69.35,2.19
N$65
  Bottom 0.6: R10.1 74.75,11.71 76.34,11.71 77.61,12.98 77.61,16.79 83,22.19 | T1.2 82.06,31.07 83.96,29.18 83.96,23.14 83.32,22.51 83,22.19 | D2.C 84.55,20.64 83.96,21.24 83,22.19
  Bottom 1.016: 83.32,23.14 arc-90 84.59,21.87 84.59,21.24 arc-90 83.96,20.6 82.05,20.6 arc90 83.32,21.87 83.32,22.51 | 83.96,22.51 83.96,21.24
  pour Bottom: 82.85,29.65 82.85,22.67 76.34,16.16 76.34,11.08 78.56,13.3 78.56,16.48 82.05,19.97 84.91,19.97 85.23,20.29 85.23,29.18
  pour Bottom (no thermals): 82.85,29.65 81.42,31.08 81.42,32.03 82.37,32.03 85.23,29.18
  pour Bottom (no thermals): 76.34,11.08 74.75,11.08 74.75,12.51 75.7,12.51 76.34,13.14
N$66
  Bottom 1.016: 81.42,74.58 92.21,74.58
N$67
  Bottom 1.016: 26.81,0.28 50.94,0.28
N$68
  Bottom 1.016: 69.35,0.28 91.58,0.28
RESET
  Top 0.6: S1.3 66.81,26.95 66.81,20.6 S1.4
  Bottom 0.6: 66.81,32.03 64.27,34.57 | 66.81,32.03 ICSP.5 | 34.9,8.06 38.08,4.89 38.14,4.95 38.14,8.22 POWER.1 | 71.89,9.17 71.89,15.2 66.81,20.28 66.81,20.6 S1.4 | 74.43,9.17 74.43,9.16 R11.1 | S1.3 66.78,26.95 66.81,26.95 66.81,32.03 | 34.9,8.06 40.14,2.82 67.76,2.82 74.11,9.17 | 34.9,8.06 34.9,9.81 34.9,10.44 JP4.1
  Bottom 1.016: 64.27,34.57 IC1.1 | 71.89,9.17 74.11,9.17 74.43,9.17
  pour Bottom: 72.53,15.52 72.53,10.12 73.16,9.49 74.43,9.49 67.77,2.82 40.14,2.82 34.75,8.22 34.75,11.08 35.38,11.08 36.17,10.28 38.08,10.28 38.08,5.84 40.78,3.14 67.45,3.14 70.62,6.32 70.62,11.39 66.5,15.52
  pour Bottom: 65.23,31.08 62.37,33.94 60.15,33.94 60.15,35.21 65.23,35.21
  pour Bottom: 66.5,15.52 65.86,16.16 65.86,20.6 67.77,20.6 72.53,15.84 72.53,15.52
  pour Bottom (no thermals): 65.23,35.21 67.92,32.51 69.04,32.51 69.04,28.38 67.13,26.64 66.18,26.64 66.18,30.13 65.23,31.08
SCK
  Bottom 0.6: IC1.19 36.97,28.86 37.6,29.49 61.1,29.49 62.05,28.54 62.05,25.05 64.59,22.51 73.8,22.51 76.34,25.05 76.34,33.62 77.61,34.89 77.61,39.02 76.02,40.6 67.13,40.6 65.86,39.34 65.86,36.48 67.76,34.57 68.24,34.1 68.88,34.1 68.88,34.57 ICSP.3 | 36.97,25.68 33.48,22.19 31.57,22.19 29.98,20.6 23.63,20.6 19.82,24.41 19.82,39.02 32.21,51.4 | 32.21,51.4 34.11,53.3 34.11,57.43 J3.6 | LED13.A 29.98,53.62 32.21,51.4
  Bottom 1.016: 36.97,25.68 36.97,28.86
  pour Bottom (no thermals): 30.94,50.13 30.94,52.35 30.14,53.15 29.03,53.15 29.03,53.94 29.35,54.26 31.89,54.26 34.43,57.12 34.43,53.62
  pour Bottom (no thermals): 68.4,33.78 66.81,35.37 69.35,35.37 69.35,33.78
SERIAL_VCC
  Bottom 0.6: 84.59,50.45 R8.1 | 80.82,50.45 R7.2 80.79,50.45 | 79.19,55.05 T2.E 79.19,55.21 79.2,55.21 79.2,56.16 77.92,57.43 74.75,57.43 74.43,57.12 JP0.2 | 79.19,55.05 79.19,54.58 80.78,52.99 80.78,52.35 80.78,50.45 80.79,50.45 | 84.59,50.45 84.59,51.24 84.12,51.72 82.53,51.72 79.2,55.05 79.19,55.05 | 80.79,50.45 84.59,50.45
  Bottom 1.016: 80.78,52.35 arc-90 82.05,51.08
  pour Bottom (isolate 0.025, no thermals): 73.96,55.53 74.91,55.53 74.91,56.64 75.7,57.43 74.75,57.43 73.96,56.64
  pour Bottom: 80.78,50.45 80.78,53.46 82.53,51.72 84.12,51.72 84.59,51.24 84.59,50.45
  pour Bottom (no thermals): 80.94,52.51 79.2,54.26 79.2,56 77.77,57.43 78.24,57.43 79.83,55.84 79.83,54.42 80.94,53.3
VIN  (1 unrouted)
  Bottom 0.6: IC2.IN 6.17,24.73 13.79,24.73 21.73,16.79 29.03,16.79 | D1.C 27.48,12.07 29.03,13.62 29.03,16.79 | C7.2 41.09,16.16 39.19,14.25 37.44,14.25 34.9,16.79 29.03,16.79 | 48.08,15.01 47.95,15.01 46.81,16.16 C7.2 | 48.08,15.01 C8.+ | POWER.6 50.87,9.56 50.54,9.89 50.55,10.83 48.08,13.3 48.08,15.01 | 48.08,15.01 48.08,15.05
  pour Bottom (no thermals): 6.81,23.78 13.79,24.73 6.81,24.73
  pour Bottom: 41.65,16.71 48.56,16.71 50.54,14.73 50.54,10.6 49.43,11.71 46.33,11.71 42.37,15.68 40.62,15.68
  pour Bottom: 27.76,16.79 29.03,15.52 29.03,13.62 30.62,15.21 30.62,16 31.41,16.79
(copper drawn outside any net)
  shapes: Bottom area x139, Bottom circle x2

## Text on the board
tNames: SERIAL | www.arduino.cc | PWM | (PWM-AT168) | AREF | 0V | 13 | 12 | 11 | 10 | 9 | 8 | 7 | 5 | 4 | 3 | 2 | 1 | 0 | TX | RX | 1 | SDA | SCL | 5V | 0 | 0 | 9V | 0 | 1 | 2 | 3 | 4 | 5 | NC | RST | ANALOG IN
bNames: JP2 | LED13 | JP1 | JP3 | Arduino | S3V.3 R2 | 2008
bValues: ENABLE
bRestrict: Arduino | R.2 | V.3 | S3 | 2008 | www.arduino.cc | AKASHI | A. | BANZI | M. | AUTO | CUARTIELLES | D. | CC BY SA 2.5 | RESET | ENABLE | MARTINO | G. | IGOE | T. | ZAMBETTI | N. | MELLIS | D.
tCredits: ADILSON AKASHI | MASSIMO BANZI | DAVID CUARTIELLES | TOM IGOE | GIANLUCA MARTINO | DAVID A. MELLIS | NICHOLAS ZAMBETTI | Released under the Creative Commons Attribution Share-Alike 2.5 License | http://creativecommons.org/licenses/by-sa/2.5/
Cooper Text: A | 0 | 13 | 12 | 11 | 10 | 9 | 8 | 7 | 5 | 4 | 2 | 1 | 0 | 3 | 1 | R | 5 | 0 | 0 | 9 | 0 | 1 | 2 | 3 | 4 | 5 | Analog in
bCredits: ADILSON AKASHI | MASSIMO BANZI | DAVID CUARTIELLES | TOM IGOE | GIANLUCA MARTINO | DAVID A. MELLIS | NICHOLAS ZAMBETTI | Released under the Creative Commons Attribution Share-Alike 2.5 License | http://creativecommons.org/licenses/by-sa/2.5/